# Altium PCB Liquid Boost.PcbDoc
Units mm, origin at the board's own origin, x right, y up, seen from the top; angles counter-clockwise.
Board outline 50 x 50 mm, 2 copper layers (Top Layer, Bottom Layer); 31 components, 19 nets, 66 pads, 5 vias.
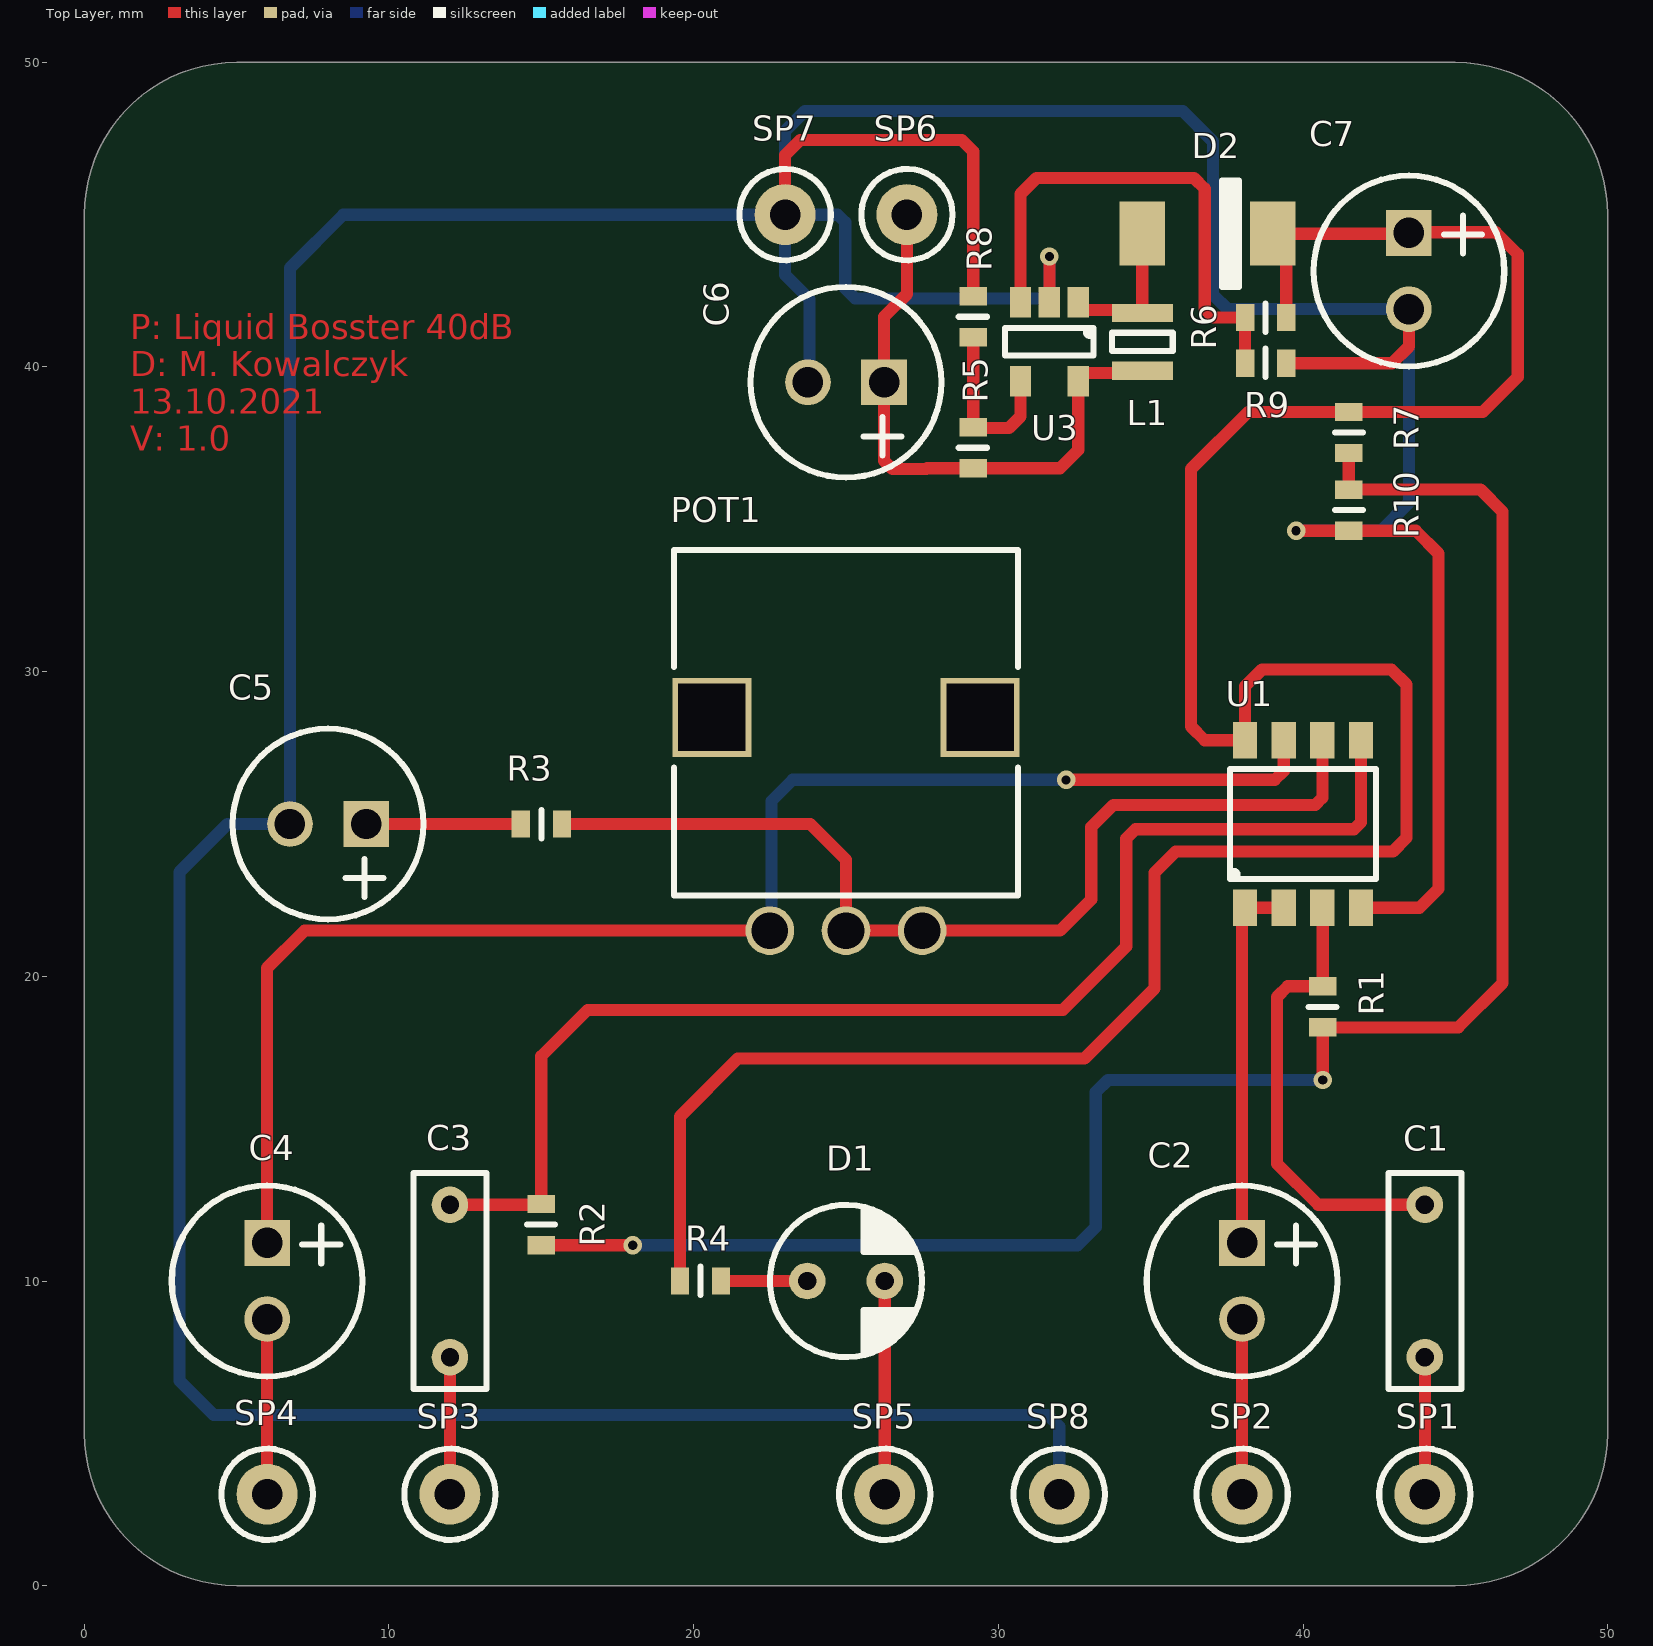
[diagram p0: Top Layer view]
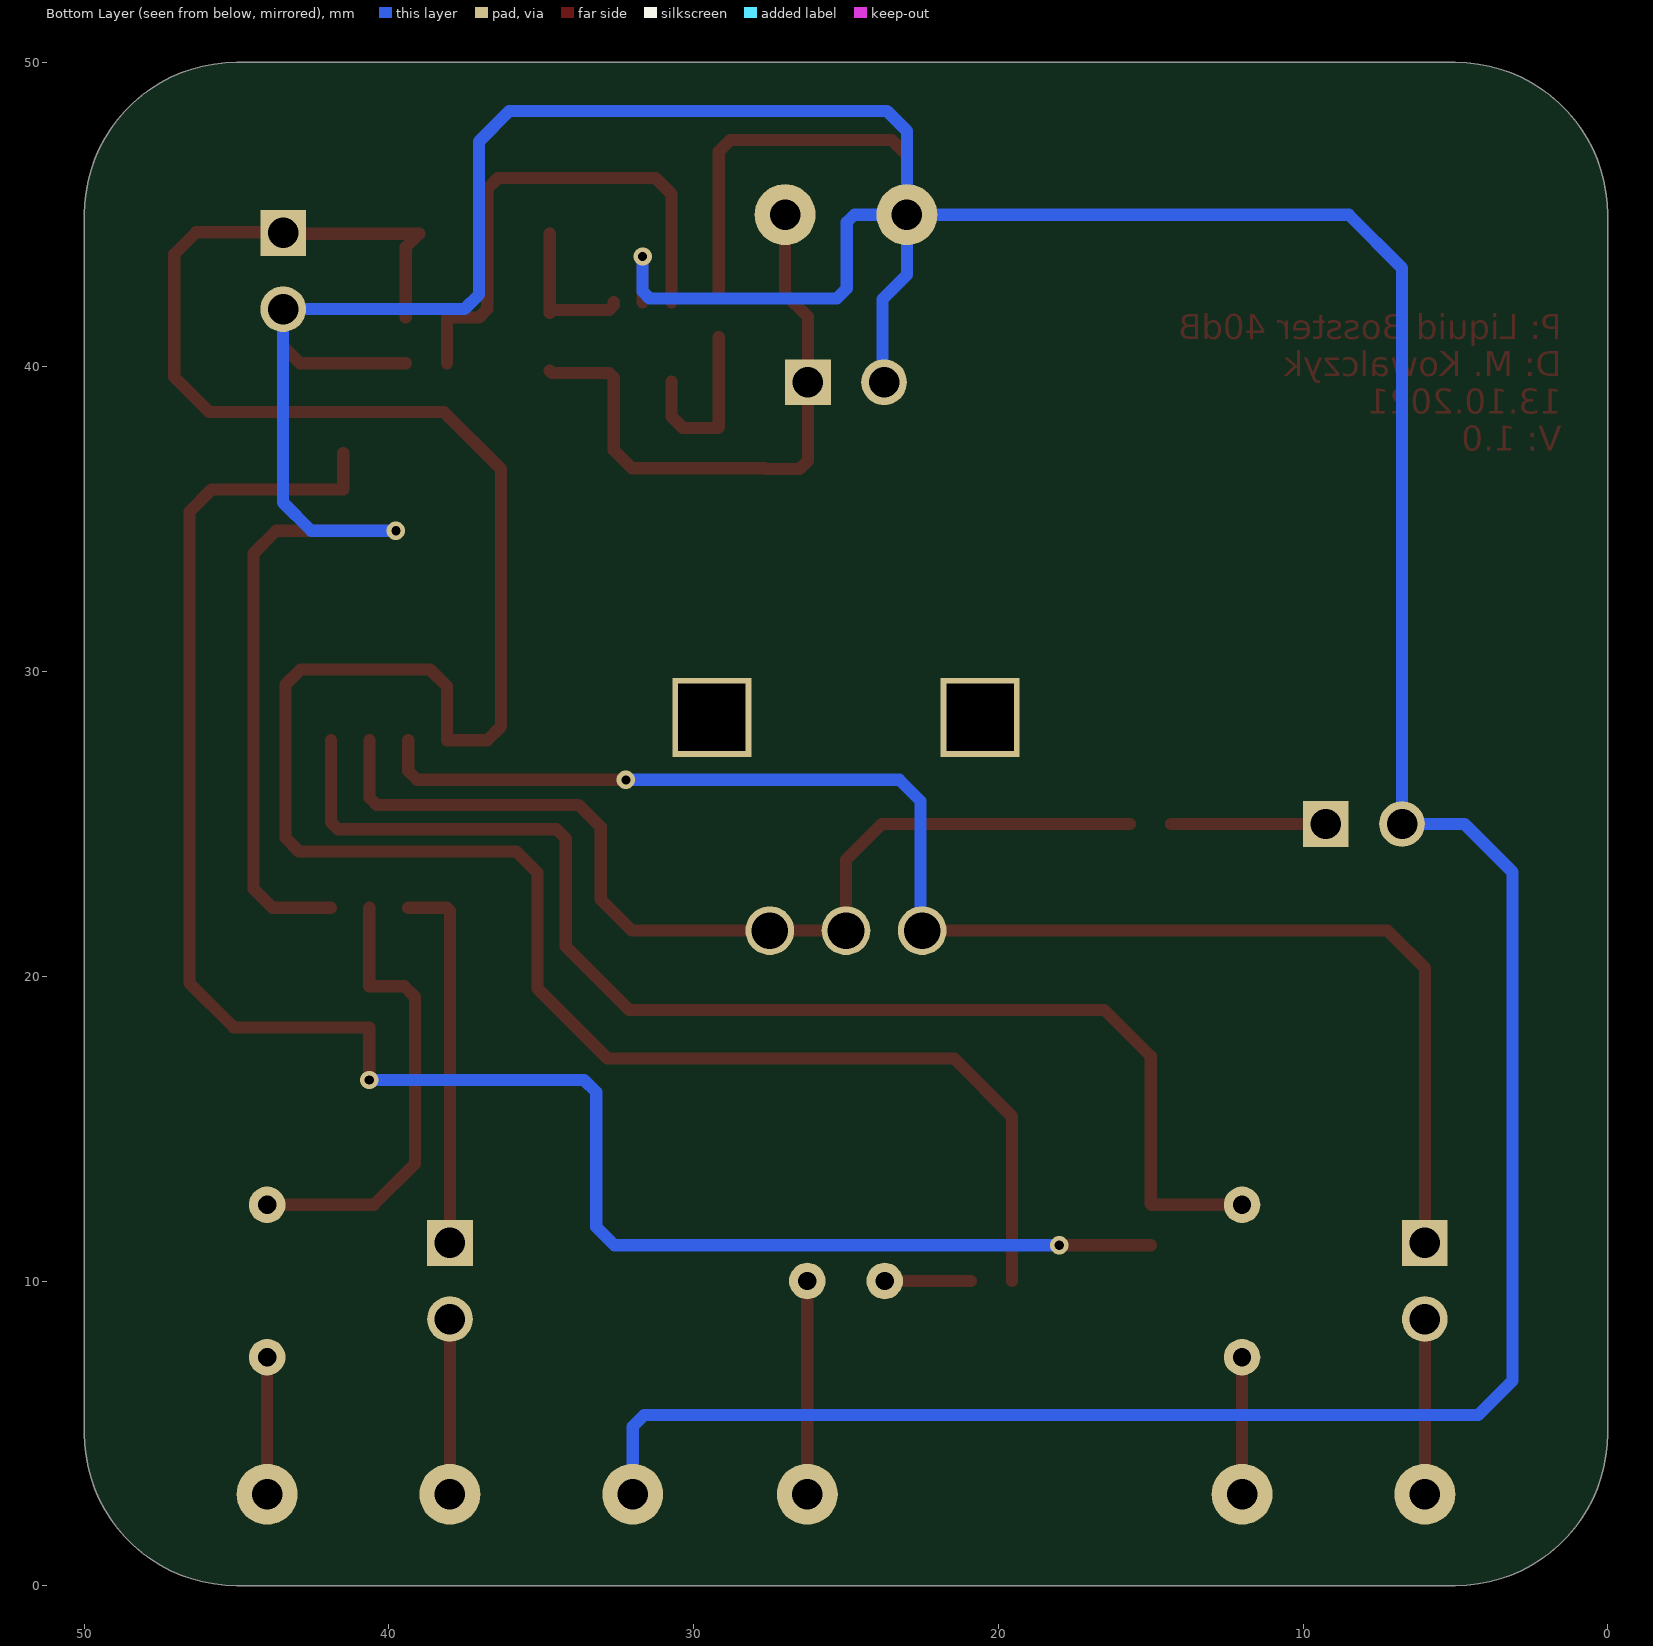
[diagram p1: Bottom Layer view, seen from below]
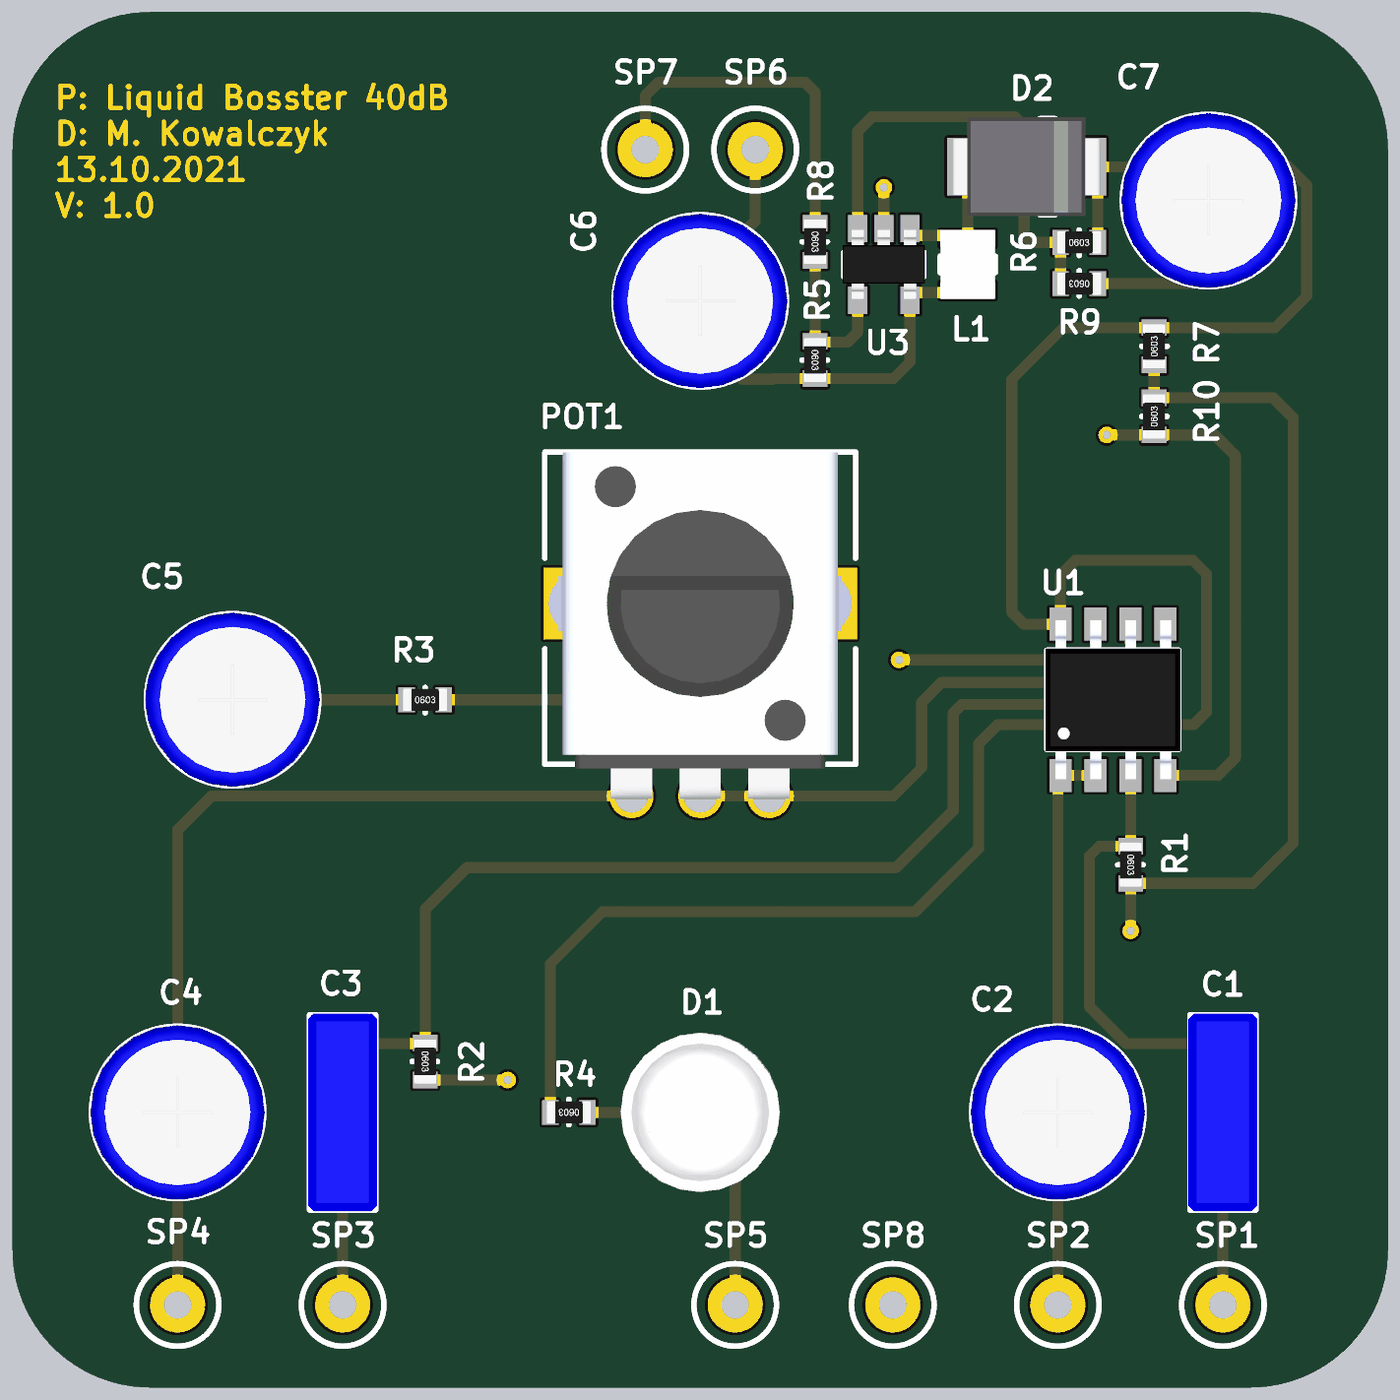
[diagram p2: 3D render of the assembled board from above, using the file's embedded part models]

## Layer stack, top to bottom
Top Solder: solder mask 0.0102, Solder Resist, Dk 3.5
Top Layer: signal copper 0.0356
Dielectric 1: dielectric 0.32, FR-4, Dk 4.8
Bottom Layer: signal copper 0.0356
Bottom Solder: solder mask 0.0102, Solder Resist, Dk 3.5

## Board outline
0,5 ccw(c5,5) 5,0 45,0 ccw(c45,5) 50,5 50,45 ccw(c45,45) 45,50 5,50 ccw(c5,45) 0,45

## Design rules (kind name [scope] priority, off if disabled: settings)
BoardOutlineClearance [All] p1: gap=0.254 ignorepadtopadclearanceinfootprint=FALSE
Clearance [All] p1: gap=0.127 ignorepadtopadclearanceinfootprint=FALSE except(0.2: Arc-SMDPad Track-SMDPad; 0.254: Arc-Via Track-Via Via-Via; 0.33: Arc-THPad Track-THPad; 0.5: THPad-THPad)
Height [All] p1: minheight=0 maxheight=50 prefheight=12.7
HoleSize [All] p1: absolutevalues=TRUE maxlimit=6.3 minlimit=0.3 maxpercent=80.000 minpercent=20.000
HoleToHoleClearance [All] p1: gap=0.5 allowstackedmicrovias=TRUE
MinimumSolderMaskSliver [All] p1: minsoldermaskwidth=0.01
PolygonConnect [All] p1: connectstyle=Relief reliefconductorwidth=0.254 reliefentries=4 polygonreliefangle="90 Angle" airgapwidth=0.254
RoutingVias [All] p1: holewidth=0.3 width=0.6 viastyle="Through Hole" minholewidth=0.3 minwidth=0.6 maxholewidth=0.3 maxwidth=0.6
SilkToSilkClearance [All] p1: silktosilkclearance=0.1
SilkToSolderMaskClearance [IsPad] p1: minsilkscreentomaskgap=0.1 clearancetoexposedcopper=TRUE
SolderMaskExpansion [All] p1: expansion=0.102 istentingtop=FALSE
Width [All] p1: maxlimit=10 minlimit=0.127 preferedwidth=0.127
24 further rules are at their usual default settings.

## Components (designator, comment, footprint, x,y, rotation, side; value= is the part's Value field where it differs from the comment)
C1 "100n 100V" R82EC3100AA70K 44,10 r90 top
C2 "10u 35V" 860010573007 38,10 r270 top
C3 "100n 100V" R82EC3100AA70K 12,10 r90 top
C4 "10u 35V" 860010573007 6,10 r270 top
C5 "10u 35V" 860010573007 8,25 r180 top
C6 "100u 35V" 860010573007 25,39.5 r180 top
C7 "100u 35V" 860010573007 43.475,43.15 r270 top
D1 "C512A-WNN-CZ0B0151" C512A-WNN-CZ0B0151 25,10 r0 top
D2 "FM240-W" FM240-W 36.85,44.375 r0 top
L1 "10uH 1.3A" VLS252012HBX-100M-1 34.725,40.825 r90 top
POT1 "100k 20%" PTV09A 25,25 r0 top
R1 "470k 1%" "RESISTOR 0603" 40.65,19 r270 top
R2 "470k 1%" "RESISTOR 0603" 15,11.85 r270 top
R3 "1k 1%" "RESISTOR 0603" 15,25 r0 top
R4 "10k 1%" "RESISTOR 0603" 20.225,10 r180 top
R5 "10k 1%" "RESISTOR 0603" 29.175,37.35 r270 top
R6 "20k 1%" "RESISTOR 0603" 38.775,41.625 r0 top
R7 "10k 1%" "RESISTOR 0603" 41.5,37.85 r90 top
R8 "10k 1%" "RESISTOR 0603" 29.175,41.65 r270 top
R9 "1k 1%" "RESISTOR 0603" 38.775,40.125 r180 top
R10 "10k 1%" "RESISTOR 0603" 41.5,35.3 r90 top
SP1 "1mm" "SOLDER PAD 1MM" 44,3 r0 top
SP2 "1mm" "SOLDER PAD 1MM" 38,3 r0 top
SP3 "1mm" "SOLDER PAD 1MM" 12,3 r180 top
SP4 "1mm" "SOLDER PAD 1MM" 6,3 r180 top
SP5 "1mm" "SOLDER PAD 1MM" 26.27,3 r0 top
SP6 "1mm" "SOLDER PAD 1MM" 27,45 r0 top
SP7 "1mm" "SOLDER PAD 1MM" 23,45 r0 top
SP8 "1mm" "SOLDER PAD 1MM" 32,3 r0 top
U1 "MC33078YDT" MC33078YDT 40,25 r0 top
U3 "LT1930AES5#TRPBF" LT1930AES5#TRPBF 31.675,40.825 r180 top

## Footprints (in the part's own frame and the unit in brackets; to place one, negate y for a bottom-side part, rotate by r counter-clockwise, add the part's x,y. Pads: shape width x height; smd on the part's side, far side on the other; paste and mask are expansions set on the pad)
860010573007 [mm]
  rect 1.5x1.5 hole 1: 1(-1.25,0)
  round 1.5 hole 1: 2(1.25,0)
  silkscreen extent -3.13,-3.13 3.13,3.13, body extent -3.18,-3.18 3.18,3.18, height 11.53
C512A-WNN-CZ0B0151 [mm]
  round 1.2 hole 0.6: 1(-1.27,0) 2(1.27,0)
  silkscreen extent -2.5,-2.5 2.5,2.5, body extent -2.9,-2.9 2.9,2.9, height 28.5
FM240-W [mm]
  rect 1.5x2.1 smd: 1(-2.125,0) 2(2.155,0)
  silkscreen extent 0.5,-1.75 1.05,1.75, body extent -2.7,-1.8 2.7,1.8, height 2.3
LT1930AES5#TRPBF [mm]
  rect 0.7x1 smd: 1(-0.95,-1.3) 2(0,-1.3) 3(0.95,-1.3) 4(0.95,1.3) 5(-0.95,1.3)
  silkscreen extent -1.45,-0.45 1.45,0.45, body extent -1.5,-1.25 1.5,1.25, height 1.1
MC33078YDT [mm]
  rect 0.8x1.2 smd: 1(-1.905,-2.75) 2(-0.635,-2.75) 3(0.635,-2.75) 4(1.905,-2.75) 5(1.905,2.75) 6(0.635,2.75) 7(-0.635,2.75) 8(-1.905,2.75)
  silkscreen extent -2.4,-1.8 2.4,1.8, body extent -2.45,-2.89 2.45,2.89, height 1.45
PTV09A [mm]
  round 1.6 hole 1.2: 1(-2.5,-3.5) 2(0,-3.5) 3(2.5,-3.5)
  rect 2.6x2.6 hole 2.2 square: ""(-4.4,3.5) ""(4.4,3.5)
  silkscreen extent -5.65,-2.35 5.65,9, body extent -5.65,-3.6 5.65,9, height 32.14
R82EC3100AA70K [mm]
  round 1.2 hole 0.6: 1(-2.5,0) 2(2.5,0)
  silkscreen extent -3.55,-1.2 3.55,1.2, body extent -3.6,-1.25 3.6,1.25, height 6.5
"RESISTOR 0603" [mm]
  rect 0.6x0.9 smd: 1(-0.675,0) 2(0.675,0)
  silkscreen extent 0,-0.48 0,0.45, body extent -0.8,-0.4 0.8,0.4, height 0.23
"SOLDER PAD 1MM" [mm]
  round 2 hole 1: 1(0,0)
  silkscreen extent -1.5,-1.5 1.5,1.5
VLS252012HBX-100M-1 [mm]
  rect 0.6x2 smd: 1(-0.95,0) 2(0.95,0)
  silkscreen extent -0.3,-1 0.3,1, body extent -1.25,-1 1.25,1, height 1.19

## Part data
C1 C3: library part "Capacitor 100n 10% 100V R82EC3100AA70K", "Film Capacitors 100V 0.1uF 10% LS=5mm AEC-Q200", Manufacturer Part Number=R82EC3100AA70K, ComponentLink1Description=Datasheet, ComponentLink1URL=https://pl.mouser.com/datasheet/2/212/1/KEM_F3101_R82-1103738.pdf
C2 C4 C5: library part "Capacitor 10u 35V 20% 5mm THT RFS-35V100ME3#5", "Aluminum Electrolytic Capacitors - Radial Leaded 10uF 35V 20% Audio SILMIC II", Manufacturer Part Number=RFS-35V100ME3#5, ComponentLink1Description=Datasheet, ComponentLink1URL=https://pl.mouser.com/datasheet/2/129/rfs_e-606.pdf
C6 C7: library part "Capacitor 100u 35V 20% 6.3mm THT 860010573007", "Aluminum Electrolytic Capacitors - Radial Leaded WCAP-ATG8 100uF 35V 20% Radial", Manufacturer Part Number=860010573007, ComponentLink1Description=Datasheet, ComponentLink1URL=https://pl.mouser.com/datasheet/2/445/860010573007-1725319.pdf
D1: library part "Diode LED 5mm White THT C512A-WNN-CZ0B0151", "Standard LEDs - Through Hole Cool White 4600K 8200-23500mcd", ComponentLink1Description=Datasheet, ComponentLink1URL=https://pl.mouser.com/datasheet/2/723/C512A_WNS_WNN_942-2257872.pdf, Manufacturer Part Number=C512A-WNN-CZ0B0151
D2: library part "Diode Schottky 2A 40V FM240-W", "Schottky Diodes & Rectifiers 2A 40V Schottky", ComponentLink1Description=Datasheet, ComponentLink1URL=https://pl.mouser.com/datasheet/2/345/fm220-fm2200-2949.pdf, Manufacturer Part Number=FM240-W
L1: library part "Inductor 10uH 1.3A 540mOhms VLS252012HBX-100M-1", "Fixed Inductors 10uH 1.3A 540mOhms Power Circuits", Manufacturer Part Number=VLS252012HBX-100M-1, ComponentLink1Description=Datasheet, ComponentLink1URL=https://product.tdk.com/system/files/dam/doc/product/inductor/inductor/smd/catalog/inductor_commercial_power_vls252012hbx-1_en.pdf
POT1: library part "Potentiometer 100k 20% PTV09A-4015F-B104", "Potentiometers 100K 20% 9MM CARBON POT", Manufacturer Part Number=PTV09A-4015F-B104, ComponentLink1Description=Datasheet, ComponentLink1URL=https://pl.mouser.com/datasheet/2/54/ptv09-777818.pdf
R1 R2: library part "Resistor 470k 1% RT0603FRE07470KL", "Thin Film Resistors - SMD 1/10W 470K ohm 1% 50ppm", Manufacturer Part Number=RT0603FRE07470KL, ComponentLink1Description=Datasheet, ComponentLink1URL=https://pl.mouser.com/datasheet/2/447/PYu_RT_1_to_0_01_RoHS_L_11-1669912.pdf
R3 R9: library part "Resistor 1k 1% RT0603FRE071KL", "Thin Film Resistors - SMD 1K ohm 1% 1/10W", Manufacturer Part Number=RT0603FRE071KL, ComponentLink1Description=Datasheet, ComponentLink1URL=https://pl.mouser.com/datasheet/2/447/PYu_RT_1_to_0_01_RoHS_L_11-1669912.pdf
R4 R5 R7 R8 R10: library part "Resistor 10k 1% RT0603FRE0710KL", "Thin Film Resistors - SMD 1/10W 10K ohm 1% 50ppm", Manufacturer Part Number=RT0603FRE0710KL, ComponentLink1Description=Datasheet, ComponentLink1URL=https://pl.mouser.com/datasheet/2/447/PYu_RT_1_to_0_01_RoHS_L_11-1669912.pdf
R6: library part "Resistor 20k 1% RT0603FRE0720KL", "Thin Film Resistors - SMD 1/10W 20K ohm 1% 50ppm", Manufacturer Part Number=RT0603FRE0720KL, ComponentLink1Description=Datasheet, ComponentLink1URL=https://pl.mouser.com/datasheet/2/447/PYu_RT_1_to_0_01_RoHS_L_11-1669912.pdf
SP1 SP2 SP3 SP4 SP5 SP6 SP7 SP8: library part "Solder Pad 1mm"
U1: library part "IC OP-AMP MC33078YDT SOP-8", "Operational Amplifiers - Op Amps CONDITIONING & INTERFACES", ComponentLink1Description=Datasheet, ComponentLink1URL=https://pl.mouser.com/datasheet/2/389/cd00000474-1795554.pdf, Manufacturer Part Number=MC33078YDT
U3: library part "IC  Boost Converter LT1930AES5#TRPBF_1", "Switching Voltage Regulators 2.2MHz Boost Conv. in 5-lead SOT-23", ComponentLink1Description=Datasheet, ComponentLink1URL=https://pl.mouser.com/datasheet/2/609/1930f-1267314.pdf, Manufacturer Part Number=LT1930AES5#TRPBF

## Via types
v1: diameter 0.6, hole 0.3, Top Layer to Bottom Layer, 5 vias

## Nets (pads, with @x,y where several pads share a name; then routed paths per layer and width w, separated by ;. In a path a pad name is that pad's centre, name@x,y a point inside that pad or via, vN(x,y) a via of type N, cw(c..) or ccw(c..) an arc to the next point about the centre after c; other vN are vias at no path point)
+V: C7.1 D2.2 R4.2 R6.2 R7.2 U1.8 | length 85.5
  Top Layer w0.4: R4.2 19.55,15.4 21.45,17.3 32.825,17.3 35.125,19.6 35.125,23.4 35.825,24.1 42.95,24.1 43.4,24.55 43.4,29.575 42.9,30.075 38.65,30.075 38.095,29.52 U1.8 36.775,27.75 36.325,28.2 36.325,36.65 38.2,38.525 R7.2 45.9,38.525 47.05,39.675 47.05,43.7 46.325,44.425 43.5,44.425 C7.1 43.45,44.375 D2.2 39.45,43.93 R6.2
+Vb: R1.2 R2.2 R7.1 R10.2 | length 60.7
  Top Layer w0.4: R2.2 v1(18,11.175) ; v1(40.65,16.6) R1.2 45.099,18.325 46.55,19.776 46.55,35.25 45.825,35.975 R10.2 R7.1
  Bottom Layer w0.4: v1(18,11.175) 32.6,11.175 33.2,11.775 33.2,16.2 33.6,16.6 v1(40.65,16.6)
GND: C5.2 C6.2 C7.2 R8.1 R9.1 R10.1 SP7.1 SP8.1 U1.4 U3.2 | length 184.7
  Top Layer w0.4: SP7.1 23,46.95 23.5,47.45 28.8,47.45 29.175,47.075 R8.1 ; U3.2 v1(31.675,43.625) ; R9.1 42.925,40.125 43.475,40.675 C7.2 ; v1(39.775,34.625) R10.1 43.7,34.625 44.45,33.875 44.45,22.875 43.825,22.25 U1.4
  Bottom Layer w0.4: C6.2 23.8,39.55 23.8,42.225 23,43.025 SP7.1 ; v1(31.675,43.625) 31.675,42.475 31.45,42.25 25.3,42.25 24.975,42.575 24.975,44.751 24.726,45 SP7.1 ; SP8.1 32,5.225 31.625,5.6 4.25,5.6 3.125,6.725 3.125,23.425 4.7,25 C5.2 6.75,43.25 8.5,45 SP7.1 ; v1(39.775,34.625) 42.55,34.625 43.475,35.55 C7.2 37.525,41.9 37.05,42.375 37.05,47.4 36.05,48.4 23.65,48.4 23,47.75 SP7.1
NetC1_1: C1.1 SP1.1 | length 4.5
  Top Layer w0.4: SP1.1 C1.1
NetC1_2: C1.2 R1.1 U1.3 | length 15.1
  Top Layer w0.4: U1.3 40.65,22.235 R1.1 39.5,19.675 39.15,19.325 39.15,13.85 40.5,12.5 C1.2
NetC2_1: C2.1 U1.1 U1.2 | length 12.3
  Top Layer w0.4: C2.1 38,22.155 U1.1 U1.2
NetC2_2: C2.2 SP2.1 | length 5.8
  Top Layer w0.4: SP2.1 C2.2
NetC3_1: C3.1 SP3.1 | length 4.5
  Top Layer w0.4: SP3.1 C3.1
NetC3_2: C3.2 R2.1 U1.5 | length 42.7
  Top Layer w0.4: C3.2 14.975,12.5 R2.1 15,17.375 16.525,18.9 32.125,18.9 34.2,20.975 34.2,24.525 34.5,24.825 41.671,24.825 41.905,25.059 U1.5
NetC4_1: C4.1 POT1.1 U1.7 | length 48.5
  Top Layer w0.4: C4.1 6,20.275 7.225,21.5 POT1.1 ; v1(32.225,26.45) 39.072,26.45 39.365,26.743 U1.7
  Bottom Layer w0.4: POT1.1 22.55,21.55 22.55,25.75 23.25,26.45 v1(32.225,26.45)
NetC4_2: C4.2 SP4.1 | length 5.8
  Top Layer w0.4: SP4.1 C4.2
NetC5_1: C5.1 R3.1 | length 5.1
  Top Layer w0.4: C5.1 R3.1
NetC6_1: C6.1 L1.1 R5.2 SP6.1 U3.5 | length 19.7
  Top Layer w0.4: SP6.1 27,42.4 26.25,41.65 C6.1 26.25,36.925 26.522,36.653 27.644,36.653 27.667,36.675 R5.2 32.025,36.675 32.625,37.275 32.625,39.65 32.775,39.8 34.65,39.8 L1.1
NetD1_1: D1.1 R4.1 | length 2.8
  Top Layer w0.4: R4.1 D1.1
NetD1_2: D1.2 SP5.1 | length 7
  Top Layer w0.4: SP5.1 D1.2
NetD2_1: D2.1 L1.2 U3.1 | length 4.9
  Top Layer w0.4: U3.1 32.625,42.025 32.775,41.875 34.625,41.875 L1.2 D2.1
NetPOT1_2: POT1.2 POT1.3 R3.2 U1.6 | length 32.9
  Top Layer w0.4: R3.2 23.825,25 25,23.825 POT1.2 POT1.3 32.025,21.5 33.05,22.525 33.05,24.9 33.775,25.625 40.401,25.625 40.635,25.859 U1.6
NetR5_1: R5.1 R8.2 U3.4 | length 5.8
  Top Layer w0.4: R8.2 29.175,38.075 R5.1 29.2,38 30.35,38 30.725,38.375 U3.4
NetR6_1: R6.1 R9.2 U3.3 | length 16.9
  Top Layer w0.4: U3.3 30.725,45.675 31.25,46.2 36.425,46.2 36.775,45.85 36.775,41.9 37.05,41.625 R6.1 R9.2
pads on no net: POT1.

## Other copper
Top Layer:
  text "P: Liquid Bosster 40dB / D: M. Kowalczyk / 13.10.2021 / V: 1.0" at 1.5,37.25 h0.81

## Silkscreen, mask and mechanical layers (free items; w line width, h text height)
Top Solder:
  text "P: Liquid Bosster 40dB / D: M. Kowalczyk / 13.10.2021 / V: 1.0" at 1.5,37.25 h0.81
Outline:
  the board outline again, w0.1